# Altium PCB stepperPCB.PcbDoc
Units mm, origin at the board's own origin, x right, y up, seen from the top; angles counter-clockwise.
Board outline 38 x 38 mm, 2 copper layers (Top Layer, Bottom Layer); 70 components, 55 nets, 250 pads, 59 vias.
Unrouted connection lines stored in the file: 2.
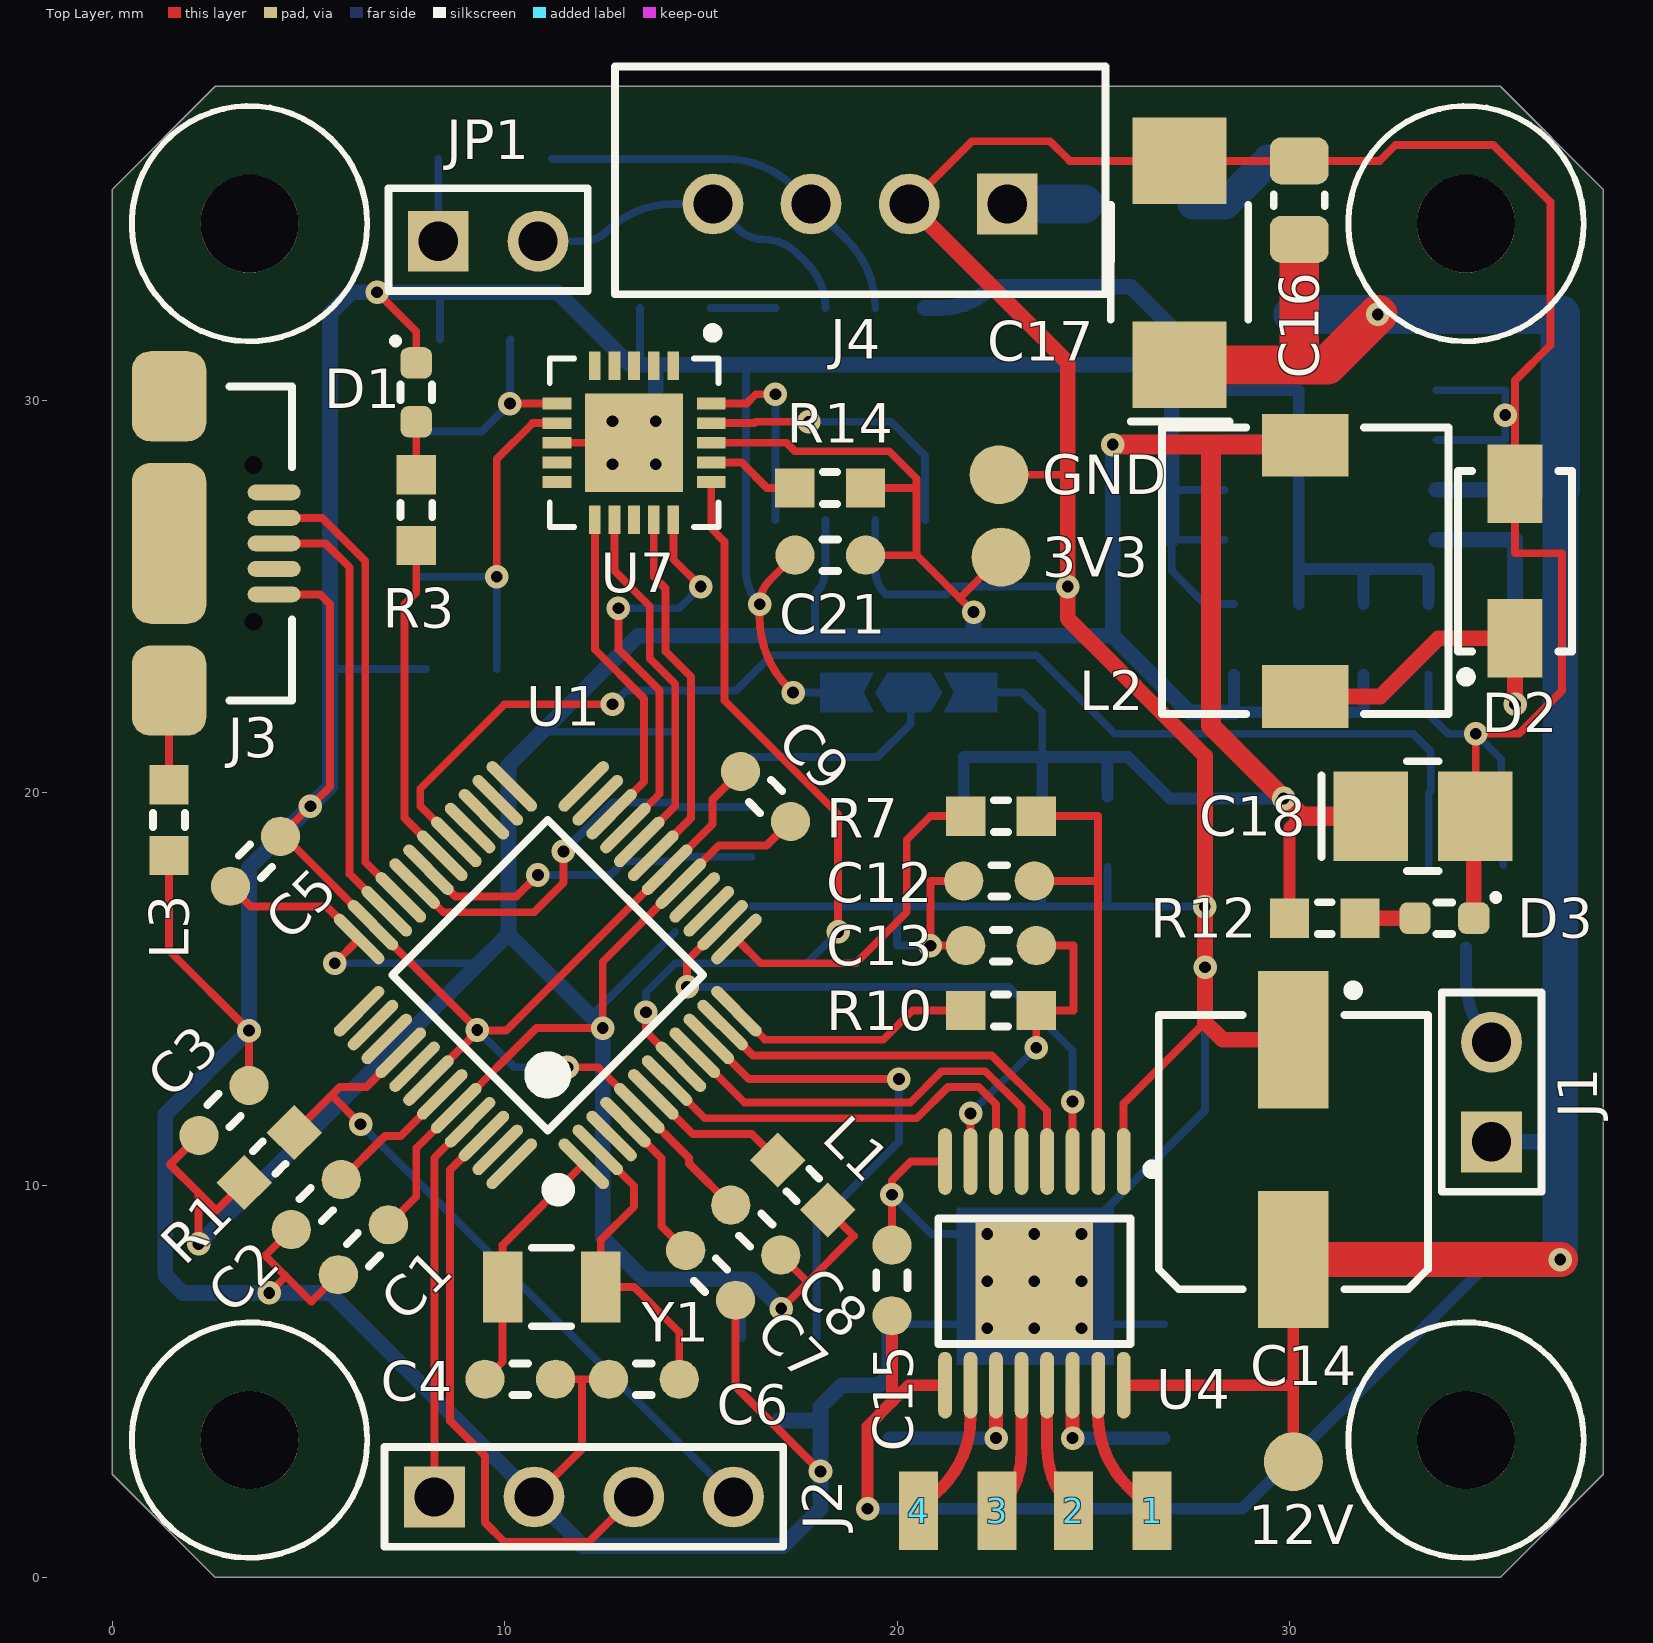
[diagram p0: Top Layer view]
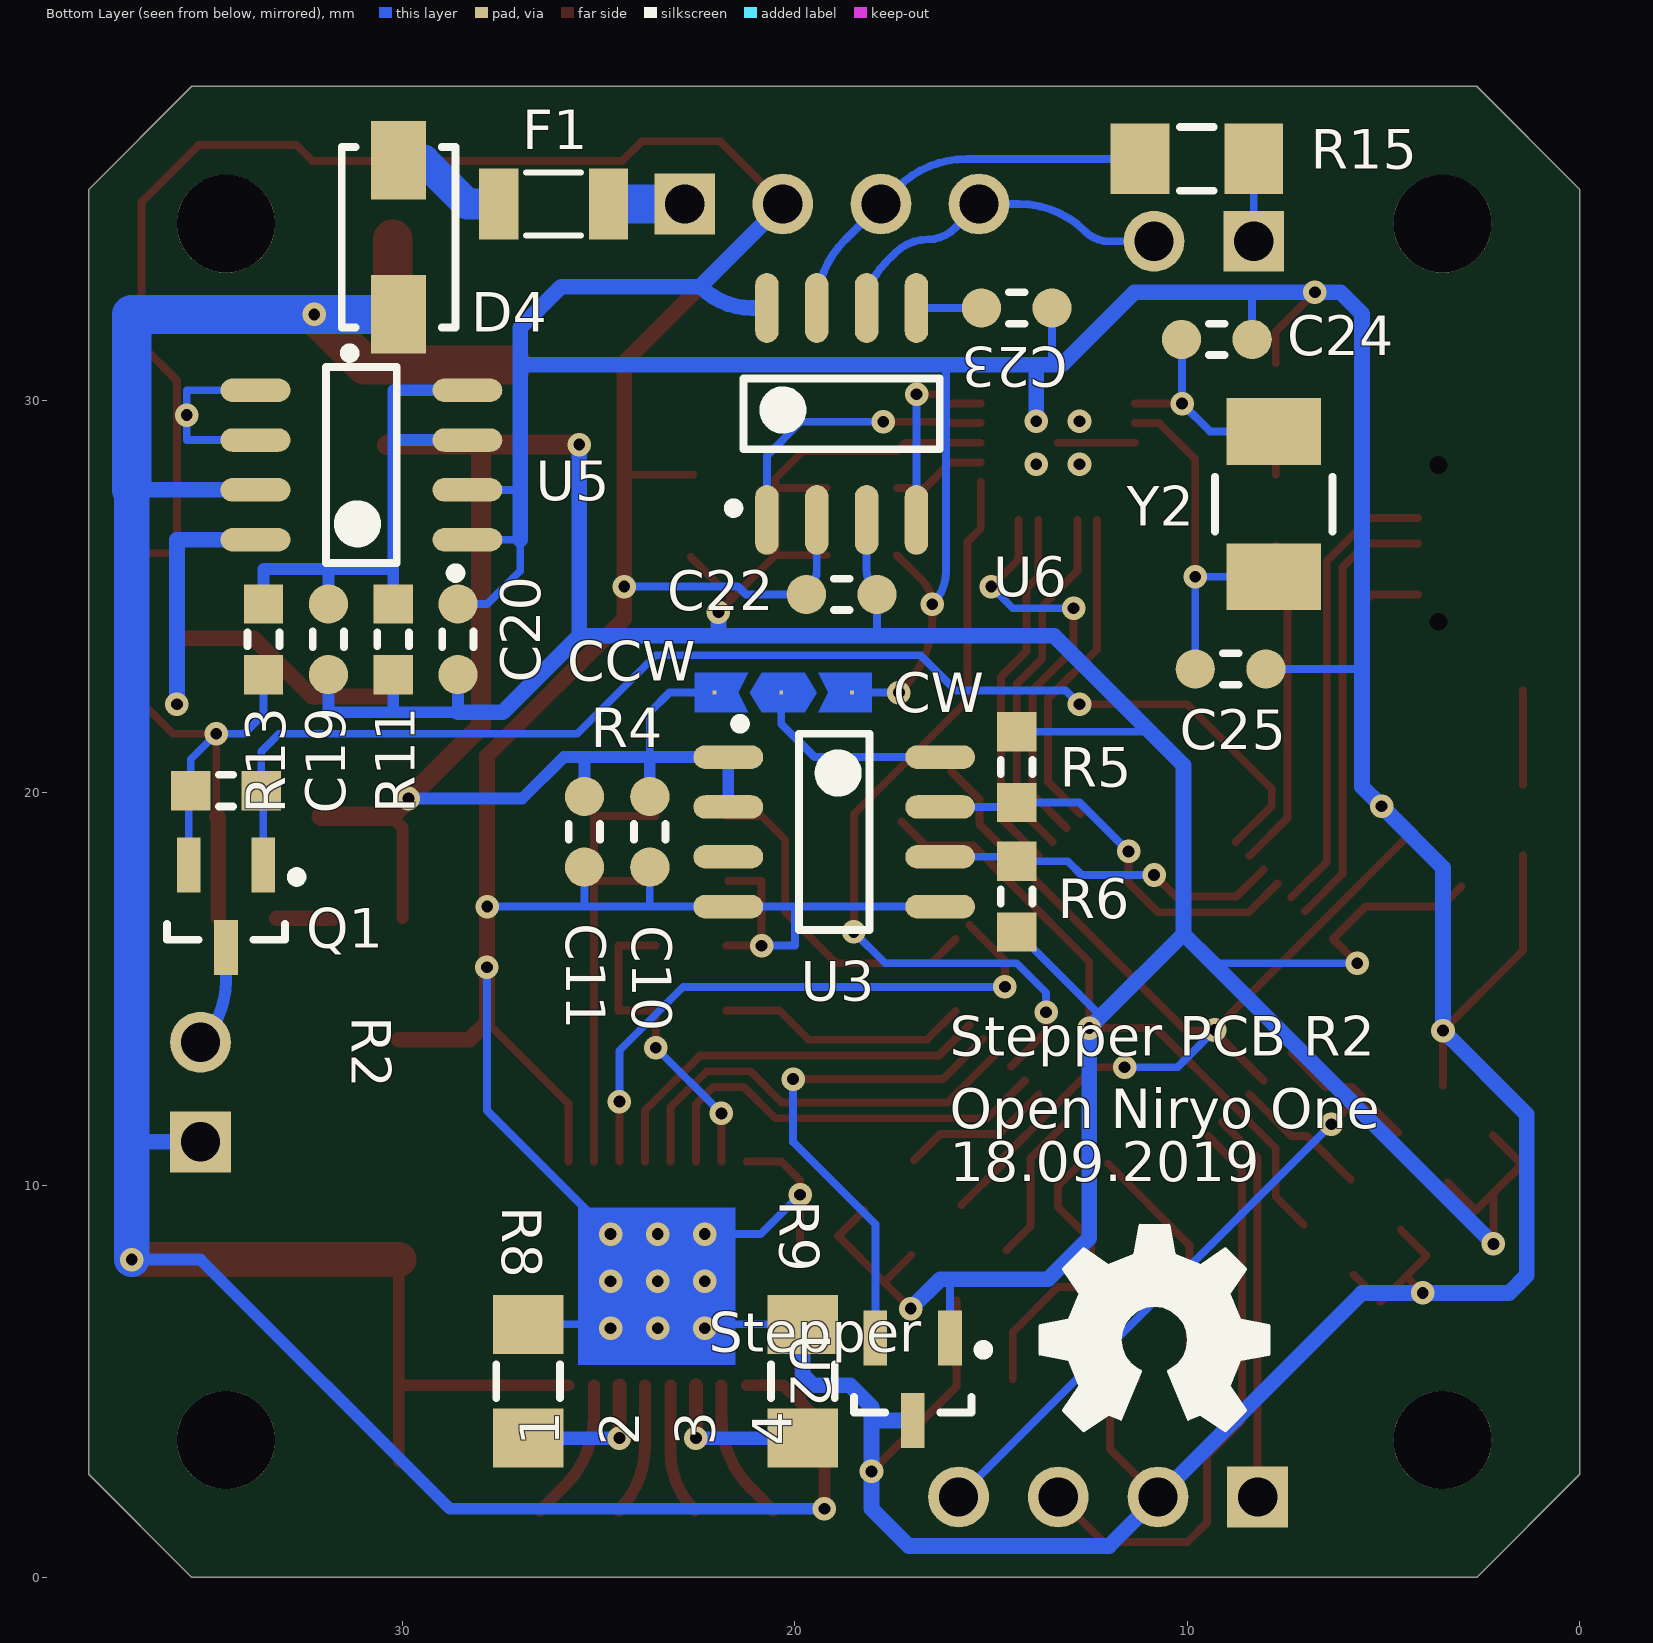
[diagram p1: Bottom Layer view, seen from below]

## Layer stack, top to bottom
Top Solder: solder mask 0.0102, Solder Resist, Dk 3.5
Top Layer: signal copper 0.0356
Dielectric1: dielectric 0.32, FR-4, Dk 4.8
Bottom Layer: signal copper 0.0356
Bottom Solder: solder mask 0.0102, Solder Resist, Dk 3.5

## Board outline
2.628,38 0,35.371 0,2.628 2.628,0 35.372,0 38,2.628 38,35.371 35.372,38

## Design rules (kind name [scope] priority, off if disabled: settings)
Clearance ViaToViaClearance [IsVia vs IsVia] p1: gap=0.2
Clearance PolyClearance [InPolygon] p2: gap=0.2
Clearance PadToPadClearance [IsPad vs IsPad] p3: gap=0.2
Clearance TrackToAllClearance [IsTrack] p4: gap=0.2
HoleSize [All] p1: absolutevalues=TRUE maxlimit=10 minlimit=0.025 maxpercent=80.000 minpercent=20.000
HoleToHoleClearance [All] p1: gap=0.2 allowstackedmicrovias=TRUE
MinimumSolderMaskSliver [All] p1: minsoldermaskwidth=0.15
PolygonConnect [All] p1: connectstyle=Relief reliefconductorwidth=0.254 reliefentries=4 polygonreliefangle="90 Angle" airgapwidth=0.254
RoutingVias [All] p1: holewidth=0.3 width=0.6 viastyle="Through Hole" minholewidth=0.3 minwidth=0.6 maxholewidth=0.3 maxwidth=0.7
SilkToSilkClearance [All] p1: silktosilkclearance=0.2
SilkToSolderMaskClearance [IsPad] p1: minsilkscreentomaskgap=0.2 clearancetoexposedcopper=TRUE
SolderMaskExpansion [All] p1: expansion=0.1
Width [All] p1: maxlimit=10 minlimit=0.15 preferedwidth=0.5
25 further rules are at their usual default settings.

## Classes and differential pairs
component class Stepper: 1 2 3 4 C10 C11 C12 C13 C14 C15 C? R4 R5 R6 R7 R8 R9 R10 R? U3 U4
component class Core: C1 C2 C3 C4 C5 C6 C7 C8 C9 D1 J1 J2 L1 Q1 R1 R2 R3 U1 U2 Y1
component class CAN: 3V3 6 12V C16 C17 C18 C19 C20 C21 C22 C23 C24 C25 D2 D3 D4 D6 D7 F1 GND J3 J4 JP1 L2 L3 R11 R12 R13 R14 R15 U5 U6 U7 Y2

## Components (designator, comment, footprint, x,y, rotation, side; value= is the part's Value field where it differs from the comment)
1 "Lamel" LAMEL#1 26.475,1.675 r180 top
2 "Lamel" LAMEL#2 24.525,1.675 r0 top
3 "Lamel" LAMEL#2 22.575,1.675 r0 top
3V3 "TestPoint" TestPoint 22.65,26 r90 top (schematic designator 6)
4 "Lamel" LAMEL#2 20.575,1.675 r0 top
12V "TestPoint" TestPoint 30.1,2.95 r0 top (schematic designator 5)
C1 "0.1uF" CHIP_C_0603 6.4,8.35 r45 top
C2 "1uF" CHIP_C_0603 5.2,9.5 r225 top
C3 "0.1uF" CHIP_C_0603 2.85,11.9 r225 top
C4 "22pF" CHIP_C_0603 10.4,5.05 r180 top
C5 "0.1uF" CHIP_C_0603 3.65,18.25 r45 top
C6 "22pF" CHIP_C_0603 13.55,5.05 r0 top
C7 "0.1uF" CHIP_C_0603 15.25,7.7 r315 top
C8 "0.1uF" CHIP_C_0603 16.4,8.85 r315 top
C9 "0.1uF" CHIP_C_0603 16.65,19.9 r135 top
C10 "0.1uF" CHIP_C_0603 23.7,19 r90 bottom
C11 "10uF" CHIP_C_0603 25.366,19 r90 bottom
C12 "0.1uF" CHIP_C_0603 22.6,17.75 r0 top
C13 "0.1uF" CHIP_C_0603 22.65,16.1 r0 top
C14 "100uF x 35V" ALUM_CAP_D 30.1,10.9 r270 top
C15 "0.22uF" CHIP_C_0603 19.871,7.568 r270 top
C16 "1uF" CHIP_C_0805 30.25,35.1 r270 top
C17 "68uF x 16V" "TANTAL - C" 27.2,33.5 r90 top
C18 "100uF x 10V" "Tantal - B" 33.4,19.4 r0 top
C19 "4.7nF" CHIP_C_0603 31.891,23.906 r90 bottom
C20 "0.1uF" CHIP_C_0603 28.589,23.906 r270 bottom
C21 "0.1uF" CHIP_C_0603 18.3,26.05 r0 top
C22 "0.1uF" CHIP_C_0603 18.81,25.05 r180 bottom
C23 "0.1uF" CHIP_C_0603 14.35,32.35 r0 bottom
C24 "22pF" CHIP_C_0603 9.25,31.55 r0 bottom
C25 "22pF" CHIP_C_0603 8.9,23.15 r0 bottom
D1 "BL-HUE33-AV" CHIP_D_0603 7.75,30.2 r90 top
D2 "10MQ040(60)" DO214-AC 35.75,25.9 r90 top
D3 "BL-HUE33-AV" CHIP_D_0603 33.95,16.8 r0 top
D4 "US-1G" DO214-AC 30.1,34.15 r90 bottom
F1 "1206L200" 1206Lxxx 26.15,35 r0 bottom
GND "TestPoint" TestPoint 22.6,28.1 r90 top (schematic designator GND1)
J1 "PLS-2" PLS-2 35.15,11.1 r90 top
J2 "PLS-4" PLS-4 8.21,2.05 r0 top
J3 "CUI UJ2-MIBH2-4-SMT-TR" MicroUSB-mc-258 4.125,26.35 r0 top
J4 "CWF-4" CWF-4R 22.81,35 r180 top
JP1 "PLS-2R" PLS-2R 8.31,34.05 r0 top
L1 "BLM18PG471SN1D" CHIP_R_0603 17.6,10 r135 top
L2 "CDRH74" CDRH74 30.4,25.65 r90 top
L3 "BLM18PG471SN1D" CHIP_R_0603 1.45,19.3 r270 top
Q1 "IRLML6402" SOT23 34.5,16.95 r270 bottom
R1 "10K" CHIP_R_0603 4,10.7 r225 top
R2 "10K" CHIP_R_0603 34.5,20.05 r0 bottom
R3 "330" CHIP_R_0603 7.75,27.2 r90 top
R4 "0R" "0R 0603 selector" 20.35,22.55 r180 bottom
R5 "4K7" CHIP_R_0603 14.35,20.65 r90 bottom
R6 "4K7" CHIP_R_0603 14.35,17.35 r270 bottom
R7 "1K" CHIP_R_0603 22.65,19.4 r0 top
R8 ".15RF" CHIP_R_1206 26.8,5 r90 bottom
R9 ".15RF" CHIP_R_1206 19.8,5 r90 bottom
R10 "1K" CHIP_R_0603 22.65,14.45 r0 top
R11 "5K6F" CHIP_R_0603 30.24,23.906 r270 bottom
R12 "330" CHIP_R_0603 30.9,16.8 r180 top
R13 "3K32F" CHIP_R_0603 33.542,23.906 r90 bottom
R14 "10K" CHIP_R_0603 18.295,27.762 r0 top
R15 "120R" CHIP_R_1206 9.76,36.15 r180 bottom
U1 "SAMD21G18A-AUT" LQFP48 11.1,15.35 r135 top locked
U2 "TC1047" SOT23 17,4.9 r270 bottom
U3 "AS5600" SOIC8 19,19 r180 bottom locked
U4 "A4954" TSSOP-16P 23.5,7.55 r270 top
U5 "LM2594M-ADJ" SOIC8 31.05,28.35 r0 bottom
U6 "SN65HVD230D" SOIC8 18.81,29.65 r90 bottom
U7 "MCP2515" QFN20 13.3,28.915 r270 top
Y1 "NX3215SA-32.768K-STD-MUA-8" NX3215SA 11.2,7.4 r180 top
Y2 "KX-K 16 MHZ" CHIP_CRYSTAL_5032 7.8,27.35 r270 bottom

## Footprints (in the part's own frame and the unit in brackets; to place one, negate y for a bottom-side part, rotate by r counter-clockwise, add the part's x,y. Pads: shape width x height; smd on the part's side, far side on the other; paste and mask are expansions set on the pad)
"0R 0603 selector" [mm]
  rect 0.1x0.1 smd: 1(-1.7,0) 2(0,0) 3(1.8,0)
  Top Layer region: -0.839,0.5 -1.1,0 -0.839,-0.5 -2.2,-0.5 -2.2,0.5
  Top Layer region: 0.939,-0.5 1.2,0 0.939,0.5 2.3,0.5 2.3,-0.5
  Top Layer region: -0.5,-0.5 -0.5,0.5 0.6,0.5 0.9,0 0.6,-0.5
  Top Layer region: 0.6,0.5 0.6,-0.5 -0.5,-0.5 -0.8,0 -0.5,0.5
  body extent -0.36,-0.49 2.24,0.51, height 0.48
1206Lxxx [mm]
  rect 1x1.8 smd: 1(-1.4,0) 2(1.4,0)
  silkscreen extent -0.7,-0.8 0.7,0.8, body extent -1.6,-0.83 1.6,0.83, height 0.56
ALUM_CAP_D [mm]
  rect 3.5x1.8 smd: 1(-2.8,0) 2(2.8,0)
  silkscreen extent -4.19,-3.43 3.56,3.43, body extent -3.3,-3.3 3.3,3.3, height 5.55
CDRH74 [mm]
  rect 1.6x2.2 smd: 1(-3.2,0) 2(3.2,0)
  silkscreen extent -3.65,-3.65 3.65,3.65, body extent -3.65,-3.65 3.65,3.65, height 4.5
CHIP_C_0603 [mm] "CHIP_C_0603"
  round 1 smd: 1(-0.9,0) 2(0.9,0)
  silkscreen extent -0.2,-0.4 0.2,0.4, body extent -0.8,-0.4 0.8,0.4, height 0.3
CHIP_C_0805 [mm] "CHIP_C_0805"
  rrect50% 1.2x1.5 smd: 1(-1,0) 2(1,0)
  silkscreen extent -0.15,-0.65 0.15,0.65, body extent -1,-0.62 1,0.63, height 0.78
CHIP_CRYSTAL_5032 [mm]
  rect 1.7x2.4 smd: 1(-1.85,0) 2(1.85,0)
  silkscreen extent -0.7,-1.5 0.7,1.5, body extent -2.5,-1.6 2.5,1.6, height 1.3
CHIP_D_0603 [mm]
  rrect50% 0.8x0.8 smd: 1(-0.75,0) 2(0.75,0)
  silkscreen extent -0.2,-0.4 1.35,0.57, body extent -0.81,-0.4 0.81,0.4, height 0.6
CHIP_R_0603 [mm] "CHIP_R_0603"
  rect 1x1 smd: 1(-0.9,0) 2(0.9,0)
  silkscreen extent -0.18,-0.41 0.18,0.41, body extent -1.26,-0.49 1.34,0.51, height 0.48
CHIP_R_1206 [mm] "CHIP_R_1206"
  rect 1.5x1.8 smd: 1(-1.45,0) 2(1.45,0)
  silkscreen extent -0.43,-0.81 0.43,0.81, body extent -2.04,-0.89 2.16,0.91, height 0.58
CWF-4R [mm]
  rect 1.55x1.55 hole 1: 1(0,0)
  round 1.55 hole 1: 2(2.5,0) 3(5,0) 4(7.5,0)
  silkscreen extent -2.5,-3.5 10,2.3, body extent -2.4,-9.25 10,2.25, height 5.75
DO214-AC [mm] "Molded Diode, 2-Leads, Body 4,3x2,7mm, IPC High Density"
  rect 2x1.4 smd: 1(1.965,0) 2(-1.965,0)
  silkscreen extent -3.07,-1.45 2.3,1.45, body extent -2.5,-1.35 2.5,1.35, height 2.15
LAMEL#1 [mm]
  rect 1x2 smd: 1(-0.025,-0.025)
LAMEL#2 [mm]
  rect 1x2 smd: 1(-0.025,0.025)
LQFP48 [mm] "LQFP, 48-Leads, Body 9,1x9,1mm (max), Pitch 0,50mm,"
  oval 1.7x0.3 smd mask+0.1: 1(-4.05,2.75) 2(-4.05,2.25) 3(-4.05,1.75) 4(-4.05,1.25) 5(-4.05,0.75) 6(-4.05,0.25) 7(-4.05,-0.25) 8(-4.05,-0.75) 9(-4.05,-1.25) 10(-4.05,-1.75) 11(-4.05,-2.25) 12(-4.05,-2.75) 25(4.05,-2.75) 26(4.05,-2.25) 27(4.05,-1.75) 28(4.05,-1.25) 29(4.05,-0.75) 30(4.05,-0.25) 31(4.05,0.25) 32(4.05,0.75) 33(4.05,1.25) 34(4.05,1.75) 35(4.05,2.25) 36(4.05,2.75)
  oval 0.3x1.7 smd mask+0.1: 13(-2.75,-4.05) 14(-2.25,-4.05) 15(-1.75,-4.05) 16(-1.25,-4.05) 17(-0.75,-4.05) 18(-0.25,-4.05) 19(0.25,-4.05) 20(0.75,-4.05) 21(1.25,-4.05) 22(1.75,-4.05) 23(2.25,-4.05) 24(2.75,-4.05) 37(2.75,4.05) 38(2.25,4.05) 39(1.75,4.05) 40(1.25,4.05) 41(0.75,4.05) 42(0.25,4.05) 43(-0.25,4.05) 44(-0.75,4.05) 45(-1.25,4.05) 46(-1.75,4.05) 47(-2.25,4.05) 48(-2.75,4.05)
  silkscreen extent -4.18,-2.8 2.8,3.8, body extent -4.5,-4.5 4.5,4.5, height 1.5
MicroUSB-mc-258 [mm]
  round 0 hole 0.45: 0(-0.525,-2) 0(-0.525,2)
  oval 1.35x0.4 smd mask+0.1: 1(0,1.3) 2(0,0.65) 3(0,0) 4(0,-0.65) 5(0,-1.3)
  rrect50% 1.9x2.3 smd mask+0.1: 6(-2.675,-3.75) 6(-2.675,3.75)
  rrect50% 1.9x4.1 smd mask+0.1: 6(-2.675,0)
  silkscreen extent -1.14,-4 0.46,4, body extent -5.47,-4 0.46,4, height 2.65
NX3215SA [mm]
  rect 1x1.8 smd: 1(-1.25,0) 2(1.25,0)
  silkscreen extent -0.5,-1 0.5,1, body extent -1.6,-0.75 1.6,0.75, height 0.8
PLS-2 [mm]
  rect 1.55x1.55 hole 1: 1(0,0)
  round 1.55 hole 1: 2(2.54,0)
  silkscreen extent -1.27,-1.27 3.81,1.27, body extent -1.27,-1.27 3.81,1.27, height 8.44
PLS-2R [mm]
  rect 1.55x1.55 hole 1: 1(0,0)
  round 1.55 hole 1: 2(2.54,0)
  silkscreen extent -1.27,-1.27 3.81,1.35, body extent -1.27,-1.27 3.81,7.35, height 5.45
PLS-4 [mm]
  rect 1.55x1.55 hole 1: 1(0,0)
  round 1.55 hole 1: 2(2.54,0) 3(5.08,0) 4(7.62,0)
  silkscreen extent -1.27,-1.27 8.89,1.27, body extent -1.27,-1.27 8.89,1.27, height 8.44
QFN20 [mm]
  rect 0.73x0.3 smd: 1(-1.965,1) 2(-1.965,0.5) 3(-1.965,0) 4(-1.965,-0.5) 5(-1.965,-1) 11(1.965,-1) 12(1.965,-0.5) 13(1.965,0) 14(1.965,0.5) 15(1.965,1)
  rect 0.3x0.73 smd: 6(-1,-1.965) 7(-0.5,-1.965) 8(0,-1.965) 9(0.5,-1.965) 10(1,-1.965) 16(1,1.965) 17(0.5,1.965) 18(0,1.965) 19(-0.5,1.965) 20(-1,1.965)
  rect 2.5x2.5 smd: 21(0,0)
  silkscreen extent -2.92,-2.15 2.15,2.15, body extent -2,-2 2.01,2.01, height 0.9
SOIC8 [mm] "SOIC, 8-Leads, Body 5,0x4,0mm (max), Pitch 1,27mm, IPC Medium Density"
  oval 1.78x0.6 smd: 1(-2.7,1.905) 2(-2.7,0.635) 3(-2.7,-0.635) 4(-2.7,-1.905) 5(2.7,-1.905) 6(2.7,-0.635) 7(2.7,0.635) 8(2.7,1.905)
  silkscreen extent -2.53,-2.5 0.9,2.88, body extent -3,-2.45 3,2.45, height 1.75
SOT23 [mm] "SOT23, 3-Leads, Body 3,0x2,6mm (max), Pitch 0,95mm, IPC Medium Density"
  rect 1.4x0.6 smd: 1(-1.2,0.95) 2(-1.2,-0.95) 3(0.9,0)
  silkscreen extent -1.02,-1.5 0.7,1.92, body extent -1.53,-1.46 1.02,1.46, height 0.99
"Tantal - B" [mm]
  rect 1.9x2.28 smd: 1(-1.33,0) 2(1.33,0)
  silkscreen extent -2.58,-1.4 0.4,1.4, body extent -1.75,-1.4 1.75,1.4, height 1.9
"TANTAL - C" [mm]
  rect 2.2x2.4 smd: 1(-2.6,0) 2(2.6,0)
  silkscreen extent -4.04,-1.75 1.47,1.75, body extent -3,-1.6 3,1.6, height 2.5
TestPoint [mm]
  round 1.5 smd: 1(0,0)
TSSOP-16P [mm]
  oval 1.7x0.35 smd: 1(-3.05,2.275) 2(-3.05,1.625) 3(-3.05,0.975) 4(-3.05,0.325) 5(-3.05,-0.325) 6(-3.05,-0.975) 7(-3.05,-1.625) 8(-3.05,-2.275) 9(2.65,-2.275) 10(2.65,-1.625) 11(2.65,-0.975) 12(2.65,-0.325) 13(2.65,0.325) 14(2.65,0.975) 15(2.65,1.625) 16(2.65,2.275)
  rect 3x3 smd: 17(0,0)
  silkscreen extent -2.97,-2.45 1.6,3.13, body extent -3.2,-2.5 3.2,2.5, height 1.1

## Part data
C1 C2 C3 C4 C5 C6 C7 C8 C9 C10 C11 C12 C13 C15 C16 C19 C20 C21 C22 C23 C24 C25: library part CHIP_C
C14: library part Electrolit
C17 C18: library part Tantal
D1 D3: library part KP-3216, "LED"
D2: library part 10MQ040, "Rectifier diode"
F1: library part miniSMDC014F-2
J1: "Connector"
J3: library part USB_micro, "Micro USB connector"
JP1: library part PLS-2
L1 L3: library part BLM
L2: "Ferrite drum core construction"
Q1: "p-chanal MOSFET"
R1 R2 R3 R5 R6 R7 R10 R11 R12 R13 R14: library part RES_0603
R4: library part Selector_0603
R8 R9: library part RES_1206, "Resistor"
R15: library part RES_1206
U2: "Temperature Sensor"
U3: "program magnetic rotary position  sensor"
U4: "DMOS PWM Motor Driver"
U5: library part LM2594
U6: library part TJA1050
U7: library part MCP2515_QFN
Y1 Y2: library part Quartz

## Free pads (board coordinates)
  round 2.5 hole 2.5: 1(3.5,3.5) 1(3.5,34.5) 1(34.5,3.5) 1(34.5,34.5)

## Via types
v1: diameter 0.6, hole 0.3, Top Layer to Bottom Layer, tented both sides, 59 vias

## Nets (pads, with @x,y where several pads share a name; then routed paths per layer and width w, separated by ;. In a path a pad name is that pad's centre, name@x,y a point inside that pad or via, vN(x,y) a via of type N, cw(c..) or ccw(c..) an arc to the next point about the centre after c; other vN are vias at no path point)
1A: 4.1 U4.10 | length 3.6
  Top Layer w0.3: 4.1 21.131,2.281 ccw(c19.335,4.077) 21.875,4.077 U4.10
1B: 3.1 U4.12 | length 3.4
  Top Layer w0.3: 3.1 ccw(c21.041,3.209) 23.175,3.209 U4.12
2A: 2.1 U4.13 | length 3.4
  Top Layer w0.3: U4.13 23.825,3.33 ccw(c26.13,3.33) 2.1
2B: 1.1 U4.15 | length 3.7
  Top Layer w0.3: U4.15 25.125,4.127 ccw(c27.665,4.127) 25.869,2.331 1.1
3V3: 3V3.1 C1.2 C3.2 C5.1 C8.2 C9.1 C10.2 C11.2 C18.1 C19.1 C20.2 C21.2 C22.2 L1.1 L2.2 R1.2 R4.1 R5.2 R6.2 R11.2 R12.2 R14.2 U1.17 U1.36 U1.44 U2.1 U3.1 U3.2 U6.3 U7.18 | length 155.3
  Top Layer w0.2: v1(2.2,8.5) 2.2,9.8 ; C3.2 1.475,10.525 2.2,9.8 ; C5.1 3.527,17.1 5.461,17.1 U1.36 v1(5.672,15.65) ; R1.2 2.65,9.35 2.2,9.8 ; C1.2 7.75,9.7 7.75,10.939 U1.44 10.811,14 v1(12.5,14) 12.5,15.689 U1.17 15.461,18.65 16.673,18.65 C9.1 ; U7.18 17.185,28.915 17.4,28.7 19.8,28.7 20.5,28 20.5,27.762 ; C8.2 17.725,7.525 ; v1(17.05,6.85) 17.725,7.525 ; L1.1 18.9,8.7 17.725,7.525 ; R14.2 20.5,27.762 ; C21.2 20.5,26.05 ; v1(21.95,24.6) 21.6,24.95 ; 3V3.1 21.6,24.95 ; 20.5,26.05 21.6,24.95 ; 20.5,26.05 20.5,27.762
  Top Layer w0.3: R12.2 30,19.1 30.3,19.4
  Top Layer w0.5: v1(25.5,28.87) 28,28.87 ; L2.2 30.38,28.87 28,28.87 ; C18.1 30.3,19.4 v1(29.85,19.85) 28,21.7 28,28.87
  Bottom Layer w0.2: v1(5.672,15.65) 9.35,15.65 ; 10.95,21.55 R5.2 ; 12.2,14.3 R6.2 ; U2.1 16.05,7.6 ; 17.9,24 17.91,24.01 C22.2 ccw(c17.27,25.69) 18.175,25.69 U6.3 ; R4.1 23.2,22.55 23.7,22.05 23.7,20.905
  Bottom Layer w0.3: U3.2 U3.1 23.7,20.905 ; C10.2 23.7,20.905 ; C11.2 25.366,20.905 ; C20.2 28.589,22.05 30.24,22.05 ; v1(29.85,19.85) 26.95,19.85 25.895,20.905 25.366,20.905 ; R11.2 30.24,22.05 ; C19.1 31.891,22.05 30.24,22.05 ; 23.7,20.905 25.366,20.905
  Bottom Layer w0.4: v1(2.2,8.5) 9.35,15.65 10.1,16.4 ; v1(17.05,6.85) 16.3,7.6 16.05,7.6 13.55,7.6 12.5,8.65 v1(12.5,14) 12.2,14.3 10.1,16.4 ; v1(21.95,24.6) 21.95,24 ; v1(25.5,28.87) 25.5,24 ; 28.589,22.05 27.45,22.05 25.5,24 ; 10.1,16.4 10.1,20.7 10.95,21.55 13.4,24 17.9,24 21.95,24 ; 21.95,24 25.5,24
12V: 12V.1 C14.2 C15.2 C16.2 C17.1 D4.2 J1.1 U4.9 U4.16 U5.7 | length 87.9
  Top Layer w0.3: v1(19.25,1.75) 19.25,3.85 19.871,4.471 ; C15.2 19.871,4.471 ; U4.9 20.3,4.9 19.871,4.471 ; U4.16 30.1,4.9 ; 12V.1 30.1,4.9 ; C14.2 30.1,4.9
  Top Layer w0.9: C14.2 v1(36.9,8.1)
  Top Layer w1: C17.1 30.2,30.9 ; C16.2 30.25,30.95 30.2,30.9 ; v1(32.25,32.185) 30.965,30.9 30.2,30.9
  Bottom Layer w0.3: v1(19.25,1.75) 28.8,1.75 35.15,8.1 v1(36.9,8.1)
  Bottom Layer w0.4: U5.7 36.9,27.715 36.9,27.7 ; J1.1 36.9,11.1
  Bottom Layer w0.9: v1(36.9,8.1) 36.9,11.1 36.9,27.7
  Bottom Layer w1: D4.2 v1(32.25,32.185) 36.9,32.185 36.9,27.715
AREFA: C7.1 U1.4 | length 3.9
  Top Layer w0.2: U1.4 14,10.682 14,8.95 C7.1
CAN_CS: U1.8 U7.16 | length 20.6
  Top Layer w0.2: v1(13.6,14.4) 13.6,13.911 U1.8 ; U7.16 15.265,26.735 15.6,26.4 15.6,22.35 18.5,19.45 v1(18.5,16.45)
  Bottom Layer w0.2: v1(13.6,14.4) 13.6,14.9 14.35,15.65 17.7,15.65 v1(18.5,16.45)
CAN_INT: U1.22 U7.11 | length 8.4
  Top Layer w0.2: U7.11 12.3,23.65 13.55,22.4 13.55,20.275 U1.22
CAN_RX: U6.4 U7.20 | length 4.9
  Top Layer w0.2: U7.20 16.165,29.915 16.4,30.15 v1(16.9,30.15)
  Bottom Layer w0.2: v1(16.9,30.15) 16.9,26.955 U6.4
CAN_TX: U6.1 U7.19 | length 7.5
  Top Layer w0.2: U7.19 16.365,29.415 16.4,29.45 v1(17.75,29.45)
  Bottom Layer w0.2: v1(17.75,29.45) 19.85,29.45 20.715,28.585 U6.1
CANH: J4.3 R15.1 U6.7 | length 10.2
  Bottom Layer w0.2: R15.1 15.608,36.15 cw(c15.608,33.61) 17.404,35.406 J4.3 18.727,34.083 cw(c16.995,32.35) U6.7
CANL: J4.4 JP1.2 U6.6 | length 8.9
  Bottom Layer w0.2: JP1.2 11.996,34.05 ccw(c11.996,34.904) 12.6,34.3 cw(c14.29,32.61) 14.29,35 J4.4 15.934,34.376 ccw(c16.6,35.042) 16.6,34.1 cw(c16.6,32.893) 17.454,33.746 17.698,33.502 cw(c16.545,32.35) U6.6
FUN: Q1.1 R2.1 U1.29 | length 32.8
  Top Layer w0.2: U1.29 7.85,19.661 7.85,20.1 10,22.25 v1(12.75,22.25)
  Bottom Layer w0.2: v1(12.75,22.25) 13.1,22.6 15.9,22.6 16.8,23.5 23.55,23.5 25.55,21.5 33.15,21.5 33.6,21.05 R2.1 ccw(c33.721,19.929) 33.55,19.929 Q1.1
GND: C1.1 C2.2 C3.1 C4.1 C5.2 C6.1 C7.2 C8.1 C9.2 C10.1 C11.1 C12.1 C13.1 C14.1 C15.1 C16.1 C17.2 C18.2 C20.1 C21.1 C22.1 C23.1 C24.1 C25.1 D1.2 D2.1 D3.2 GND.1 J2.2 J3.5 J4.2 L3.2 Q1.2 R2.2 R4.3 R8.2 R9.2 R13.1 U1.5 U1.18 U1.35 U1.42 U2.3 U3.4 U3.5 U4.1 U4.8 U4.17 U5.1 U5.2 U5.5 U5.6 U6.2 U6.8 U7.8 U7.21 | length 301.3
  Top Layer w0.2: L3.2 1.45,15.973 v1(3.486,13.936) C3.1 ; v1(4,7.25) 4.4,7.65 4.4,7.7 ; J3.5 5.3,25.05 5.55,24.8 5.55,20.15 v1(5.05,19.65) C5.2 4.382,18.886 U1.35 v1@9.309,13.959 ; C2.2 3.9,8.2 4.4,7.7 ; C1.1 5.075,7.025 4.4,7.7 ; v1(6.75,32.75) 7.75,31.75 D1.2 ; U1.42 v1@9.323,13.927 ; v1@9.332,13.936 10.039,13.936 U1.18 15.3,19.196 15.3,19.823 C9.2 ; J2.2 11.975,3.275 11.975,5.05 ; C4.1 11.975,5.05 ; U7.8 U7.21 ; v1(11.6,13) 12.389,13 U1.5 14.7,10.689 14.7,10.55 C8.1 ; C6.1 11.975,5.05 ; C7.2 15.886,4.864 v1(18.05,2.7) ; v1(17.35,22.55) 17.244,22.656 cw(c19.04,24.452) 16.5,24.452 v1(16.5,24.8) cw(c17.345,24.8) 16.747,25.397 C21.1 ; C15.1 v1(19.871,9.75) 19.871,10.121 20.35,10.6 U4.8 ; J4.2 21.91,36.6 23.9,36.6 24.4,36.1 C17.2 C16.1 32.3,36.1 32.7,36.5 35.2,36.5 36.65,35.05 36.65,31.4 35.75,30.5 v1@35.75,29.62 ; C12.1 20.85,17.75 v1(20.85,16.1) C13.1 ; GND.1 24.345,28.1 24.35,28.105 ; U4.1 25.775,12.075 27.85,14.15 ; v1(27.845,17.095) v1@27.85,17.1 ; C18.2 34.75,19.42 v1(34.75,21.5) 35.85,21.5 36.95,22.6 36.95,26.1 35.75,26.1 D2.1 v1@35.75,29.6
  Top Layer w0.4: J4.2 24.35,30.96 24.35,28.105 v1(24.35,25.25) 24.35,24.431 27.85,20.931 27.85,17.1 v1(27.85,15.55) 27.85,14.15 28.3,13.7 C14.1 ; D3.2 34.7,19.37 C18.2
  Bottom Layer w0.2: 5.55,23.15 C25.1 ; C24.1 8.35,32.75 ; 8.75,4.05 8.775,4.025 ; v1(9.3,13.95) 10.25,13 v1(11.6,13) ; 13.45,30.9 C23.1 ; 16.15,30.9 16.15,25.645 ccw(c17.345,25.645) v1(16.5,24.8) ; U3.5 20,17.095 ; v1(17.35,22.55) R4.3 ; U6.2 19.445,25.69 ccw(c20.35,25.69) C22.1 21.25,25.05 21.45,25.25 v1(24.35,25.25) ; R9.2 22.3,6.45 v1(22.3,6.35) ; v1(19.871,9.75) 20.871,8.75 v1(22.3,8.75) ; v1(20.85,16.1) 20,16.1 20,17.095 ; C10.1 23.7,17.095 ; v1(24.7,8.75) 27.85,11.9 v1(27.85,15.55) ; 25.05,6.45 R8.2 ; C11.1 25.366,17.095 ; 27,27.715 U5.2 ; v1(27.845,17.095) 25.366,17.095 ; U5.1 27,26.445 27,25.65 27.844,24.806 C20.1 ; R13.1 33.542,22 34.042,21.5 v1(34.75,21.5) 35.4,20.85 R2.2 cw(c35.279,19.929) 35.45,19.929 Q1.2 ; U5.6 35.5,28.985 v1(35.5,29.62) 35.5,30.255 U5.5 ; 20,17.095 U3.4 23.7,17.095 ; 23.7,17.095 25.366,17.095
  Bottom Layer w0.4: 8.75,4.05 5.55,7.25 v1(4,7.25) 1.8,7.25 1.35,7.7 1.35,11.8 v1(3.486,13.936) 3.486,18.086 v1(5.05,19.65) 5.55,20.15 5.55,23.15 5.55,28.05 5.55,32.2 6.1,32.75 v1(6.75,32.75) 8.35,32.75 11.35,32.75 13.2,30.9 13.45,30.9 13.85,30.9 ; 8.775,4.025 J2.2 12,0.8 17.1,0.8 18.05,1.75 v1(18.05,2.7) 18.05,4 ; v1(13.85,29.465) 13.85,30.9 ; U2.3 18.05,4 ; R9.2 19.8,5.15 19.55,4.9 18.6,4.9 18.05,4.35 18.05,4 ; J4.2 22.4,32.91 22.4,32.89 ; U6.8 21.096,32.35 ccw(c21.096,34.194) 22.4,32.89 ; 27,26.445 27,27.715 27,30.9 ; 13.85,30.9 16.15,30.9 27,30.9 ; 22.4,32.89 25.96,32.89 27,31.85 27,30.9
  other v1: 23.5,6.35 24.7,6.35 22.3,7.55 23.5,7.55 24.7,7.55 23.5,8.75 12.75,28.365 13.85,28.365 12.75,29.465
IN1: U1.7 U4.6 | length 10.8
  Top Layer w0.2: U1.7 15.104,11.7 20.5,11.7 21.3,12.5 22.084,12.5 22.525,12.059 U4.6
IN2: U1.9 U4.5 | length 10.9
  Top Layer w0.2: U1.9 16.118,12.1 20.334,12.1 21.134,12.9 22.25,12.9 23.175,11.975 U4.5
IN3: U1.14 U4.3 | length 15.3
  Top Layer w0.2: v1(14.65,15.05) 14.65,15.718 U1.14 ; U4.3 v1(24.475,12.125)
  Bottom Layer w0.2: v1(14.65,15.05) 22.849,15.05 24.475,13.424 v1(24.475,12.125)
IN4: U1.11 U4.4 | length 10.5
  Top Layer w0.2: U1.11 16.332,13.3 22.416,13.3 23.825,11.891 U4.4
LED: R3.1 U1.30 | length 8.4
  Top Layer w0.2: R3.1 7.75,25.1 7.45,24.8 7.45,19.354 U1.30
LESS1: R9.1 U4.11 | length 4.1
  Top Layer w0.35: v1(22.525,3.55) U4.11
  Bottom Layer w0.35: R9.1 v1(22.525,3.55)
LESS2: R8.1 U4.14 | length 3.7
  Top Layer w0.35: v1(24.475,3.55) U4.14
  Bottom Layer w0.35: v1(24.475,3.55) R8.1
MISO: U1.21 U7.15 | length 10.7
  Top Layer w0.2: v1(12.9,24.7) 12.9,23.65 13.95,22.6 13.95,19.968 U1.21 ; U7.15 14.3,25.95 v1(15,25.25)
  Bottom Layer w0.2: v1(12.9,24.7) 14.45,24.7 v1(15,25.25)
MOSI: U1.19 U7.14 | length 9.4
  Top Layer w0.2: U1.19 14.75,19.354 14.75,22.95 14.1,23.6 14.1,25.2 13.8,25.5 U7.14
NetC4_2: C4.2 U1.1 Y1.2 | length 6.5
  Top Layer w0.2: C4.2 9.95,5.5 Y1.2 9.95,8.472 U1.1
NetC6_2: C6.2 U1.2 Y1.1 | length 7.9
  Top Layer w0.2: U1.2 13.3,9.968 13.3,9.45 12.45,8.6 Y1.1 13.3,7.4 14.45,6.25 C6.2
NetC12_2: C12.2 R7.2 U4.2 | length 12
  Top Layer w0.2: C12.2 25.125,17.75 ; R7.2 25.125,19.4 25.125,17.75 ; U4.2 25.125,17.75
NetC13_2: C13.2 R10.2 U4.7 | length 8.1
  Top Layer w0.2: U4.7 v1(21.875,11.825) ; v1(23.55,13.5) R10.2 24.5,14.45 24.5,16.1 C13.2
  Bottom Layer w0.2: v1(21.875,11.825) v1(23.55,13.5)
NetC19_2: C19.2 R11.1 R13.2 U5.3 U5.4 | length 14.3
  Bottom Layer w0.3: U5.3 30.24,28.985 ; U5.4 30.24,30.255 30.24,28.985 ; R11.1 30.24,25.7 ; C19.2 31.891,25.7 ; R13.2 33.542,25.7 31.891,25.7 ; 30.24,25.7 31.891,25.7 ; 30.24,25.7 30.24,28.985
NetC23_2: C23.2 U6.5 | length 1.7
  Bottom Layer w0.2: C23.2 U6.5
NetC24_2: C24.2 U7.6 Y2.1 | length 5.5
  Top Layer w0.2: v1(10.135,29.915) U7.6
  Bottom Layer w0.2: Y2.1 9.42,29.2 v1(10.135,29.915) 10.135,31.535 C24.2
NetC25_2: C25.2 U7.7 Y2.2 | length 9.3
  Top Layer w0.2: v1(9.8,25.5) 9.8,28.5 10.715,29.415 U7.7
  Bottom Layer w0.2: Y2.2 v1(9.8,25.5) C25.2
NetD1_1: D1.1 R3.2 | length 1.4
  Top Layer w0.2: R3.2 D1.1
NetD2_2: D2.2 L2.1 U5.8 | length 13.8
  Top Layer w0.4: L2.1 32.315,22.45 33.8,23.935 D2.2 v1(35.75,22.25)
  Bottom Layer w0.4: U5.8 35.75,26.445 v1(35.75,22.25)
NetD3_1: D3.1 R12.1 | length 1.4
  Top Layer w0.4: R12.1 D3.1
NetD4_1: D4.1 F1.2 | length 3
  Bottom Layer w0.8: F1.2 28.35,35 29.465,36.115 D4.1
NetF1_1: F1.1 J4.1 | length 1.9
  Bottom Layer w1: J4.1 F1.1
NetJ1_2: J1.2 Q1.3 | length 2.6
  Bottom Layer w0.3: Q1.3 34.5,15.209 ccw(c36.719,15.209) J1.2
NetJP1_1: JP1.1 R15.2 | length 2.1
  Bottom Layer w0.2: JP1.1 R15.2
NetL1_2: L1.2 U1.6 | length 3.9
  Top Layer w0.2: U1.6 14.796,11.3 16.3,11.3 L1.2
NetR4_2: R4.2 U3.8 | length 5.2
  Bottom Layer w0.2: U3.8 19.505,20.905 20.35,21.75 R4.2
NetR14_1: R14.1 U7.17 | length 2.4
  Top Layer w0.2: U7.17 16.035,28.415 16.688,27.762 R14.1
SCK: U1.20 U7.12 | length 9.2
  Top Layer w0.2: U7.12 12.8,25.65 13.7,24.75 13.7,23.416 14.35,22.766 14.35,19.661 U1.20
SCL: R5.1 U1.32 U3.7 | length 10.4
  Top Layer w0.2: U1.32 8.439,16.95 10.749,16.95 11.5,17.701 v1(11.5,18.5)
  Bottom Layer w0.2: v1(11.5,18.5) 12.75,19.75 R5.1 ; R5.1@14.465,19.635 U3.7
SDA: R6.1 U1.31 U3.6 | length 8.8
  Top Layer w0.2: U1.31 8.746,17.35 10.3,17.35 v1(10.85,17.9)
  Bottom Layer w0.2: v1(10.85,17.9) 12.7,17.9 13.05,18.25 R6.1 ; R6.1@14.465,18.365 U3.6
SWCLK: J2.1 U1.45 | length 9.9
  Top Layer w0.2: J2.1 8.21,10.692 U1.45
SWDIO: J2.3 U1.46 | length 15
  Top Layer w0.2: U1.46 8.61,10.385 8.61,3.99 9.5,3.1 9.5,1.4 10,0.9 12.14,0.9 J2.3
TEMP: U1.10 U2.2 | length 12.7
  Top Layer w0.2: U1.10 16.225,12.7 v1(20.05,12.7)
  Bottom Layer w0.2: U2.2 17.95,9 20.05,11.1 v1(20.05,12.7)
TRG_RST: J2.4 R1.1 U1.40 | length 18
  Top Layer w0.2: R1.1 5.575,12.275 ; v1(6.33,11.55) 5.605,12.275 5.575,12.275 ; U1.40 6.482,12.5 5.8,12.5 5.575,12.275
  Bottom Layer w0.2: v1(6.33,11.55) J2.4
USB_N: J3.2 U1.33 | length 11.7
  Top Layer w0.2: J3.2 5.35,27 6.45,25.9 6.45,18.232 U1.33
USB_P: J3.3 U1.34 | length 11.3
  Top Layer w0.2: J3.3 5.434,26.35 6.05,25.734 6.05,17.925 U1.34
USB_SHELD: J3.6 L3.1 | length 2.4
  Top Layer w0.2: L3.1 J3.6@1.45,22.6
VDDCORE: C2.1 U1.43 | length 3.5
  Top Layer w0.2: C2.1 6.95,11.25 7.354,11.25 U1.43
VREF1: R10.1 U1.12 | length 6.5
  Top Layer w0.2: U1.12 16.639,13.7 19.65,13.7 20.4,14.45 R10.1
VREF2: R7.1 U1.13 | length 8.7
  Top Layer w0.2: U1.13 16.528,15.65 18.95,15.65 20.25,16.95 20.25,18.8 20.85,19.4 R7.1
pads on no net: J3.0 J3.1 J3.4 U1.3 U1.15 U1.16 U1.23 U1.24 U1.25 U1.26 U1.27 U1.28 U1.37 U1.38 U1.39 U1.41 U1.47 U1.48 U3.3 U7.1 U7.2 U7.3 U7.4 U7.5 U7.9 U7.10 U7.13

## Other copper
Bottom Layer:
  region net GND: 21.521,9.418 21.521,5.418 25.521,5.418 25.521,9.418

## Silkscreen, mask and mechanical layers (free items; w line width, h text height)
Top Overlay:
  circle w0.15: c34.5,34.5 r3
  circle w0.15: c34.5,3.5 r3
  circle w0.15: c3.5,3.5 r3
  circle w0.15: c3.5,34.5 r3
  text "SWD" at 85.85,17.7 h1
Bottom Overlay:
  region: 11.228,8.996 11.237,8.975 11.236,8.974 11.372,8.266 11.381,8.245 11.396,8.239 11.989,7.993 12.003,7.987 12.025,7.996 12.025,7.997 12.621,8.401 12.643,8.41 12.672,8.398 12.67,8.396 13.182,7.888 13.194,7.859 13.185,7.837 12.78,7.241 12.771,7.219 12.777,7.204 13.023,6.612 13.029,6.597 13.051,6.588 13.051,6.589 13.759,6.453 13.781,6.444 13.793,6.415 13.79,6.415 13.793,5.693 13.781,5.664 13.759,5.655 13.759,5.656 13.051,5.52 13.029,5.511 13.023,5.496 12.777,4.904 12.771,4.889 12.78,4.867 12.781,4.868 13.185,4.271 13.194,4.249 13.182,4.22 13.18,4.222 12.672,3.71 12.643,3.698 12.621,3.707 12.622,3.707 12.025,4.112 12.003,4.121 11.989,4.115 11.717,4.003 11.703,3.997 11.673,4.009 11.667,4.023 11.168,5.248 11.162,5.262 11.174,5.291 11.187,5.297 11.187,5.296 11.259,5.326 11.433,5.459 11.567,5.634 11.651,5.836 11.679,6.054 11.651,6.272 11.567,6.474 11.433,6.649 11.259,6.782 11.056,6.866 10.838,6.895 10.621,6.866 10.418,6.782 10.244,6.649 10.11,6.474 10.026,6.272 9.997,6.054 10.026,5.836 10.11,5.634 10.244,5.459 10.418,5.326 10.489,5.296 10.49,5.297 10.503,5.291 10.515,5.262 10.509,5.248 10.009,4.023 10.003,4.009 9.974,3.997 9.959,4.003 9.688,4.115 9.673,4.121 9.651,4.112 9.652,4.111 9.055,3.707 9.033,3.698 9.004,3.71 9.007,3.712 8.494,4.22 8.482,4.249 8.491,4.271 8.492,4.271 8.896,4.867 8.905,4.889 8.899,4.904 8.654,5.496 8.648,5.511 8.626,5.52 8.626,5.519 7.918,5.655 7.896,5.664 7.884,5.693 7.887,5.693 7.884,6.415 7.896,6.444 7.918,6.453 7.918,6.452 8.626,6.588 8.648,6.597 8.654,6.612 8.899,7.204 8.905,7.219 8.896,7.241 8.896,7.24 8.491,7.837 8.482,7.859 8.494,7.888 8.496,7.886 9.004,8.398 9.033,8.41 9.055,8.401 9.651,7.996 9.673,7.987 9.688,7.993 10.281,8.239 10.295,8.245 10.304,8.266 10.439,8.975 10.448,8.996 10.478,9.008 10.478,9.005 11.199,9.008
  text "CCW" at 25.8,22.85 h1
  text "CW" at 17.5,22.05 h1
  text "Stepper PCB R2" at 16.05,13.3 h1
  text "Open Niryo One" at 16.05,11.45 h1
  text "18.09.2019" at 16.05,10.1 h1
  text "Stepper" at 22.2,5.75 h1
Mechanical 1:
  the board outline again, w1.2